# EAGLE board ADC_Breakout_broken (EAGLE 7.2.0)

Size 24.51 x 21.59 mm. Coordinates in mm from the lower left corner, seen from the top.
Outline: 0,0 24.51,0 24.51,21.59 0,21.59 0,0
Copper layers (1*16): Top 0.035mm / dielectric 1.5mm / Bottom 0.035mm
Design rules "default": minimum track width 10mil, minimum drill 24mil, track to track 8mil, track to pad 8mil, pad to pad 8mil, via to via 8mil, smd to smd 8mil, copper to edge 40mil, drill to drill 8mil, minimum pad ring 10mil, minimum via ring 8mil, stop-mask expansion 4mil, vias tented up to drill 0mil, thermal gap 10mil

## Footprints (pad centres in the part's own frame; a part is rotated, then mirrored left to right if it is on the bottom)
TSSOP-30 = smd 0.22 x 1: P$1 0,0; P$2 0.5,0; P$3 1,0; P$4 1.5,0; P$5 2,0; P$6 2.5,0; P$7 3,0; P$8 3.5,0; P$9 4,0; P$10 4.5,0; P$11 5,0; P$12 5.5,0; P$13 6,0; P$14 6.5,0; P$15 7,0; P$16 0,5.4; P$17 0.5,5.4; P$18 1,5.4; P$19 1.5,5.4; P$20 2,5.4; P$21 2.5,5.4; P$22 3,5.4; P$23 3.5,5.4; P$24 4,5.4; P$25 4.5,5.4; P$26 5,5.4; P$27 5.5,5.4; P$28 6,5.4; P$29 6.5,5.4; P$30 7,5.4
C0603 = smd 1.1 x 1: 1 -0.85,0; 2 0.85,0
C0805 = smd 1.3 x 1.5: 1 -0.95,0; 2 0.95,0
1X08 = drill 1.016 long: 1 -8.89,0; 2 -6.35,0; 3 -3.81,0; 4 -1.27,0; 5 1.27,0; 6 3.81,0; 7 6.35,0; 8 8.89,0
R1206 = smd 1.6 x 1.803: 1 -1.422,0; 2 1.422,0
SOIC-8 = smd 0.41 x 1.05: P$1 0,0; P$2 1.27,0; P$3 2.54,0; P$4 3.81,0; P$5 0,4.95; P$6 1.27,4.95; P$7 2.54,4.95; P$8 3.81,4.95

## Placement (x,y rotation side)
ADS7950  ADS7950  [TSSOP-30]  9.53,8.89 0 top
C1  1.0uF  [C0603]  11.56,16.38 180 bottom
C2  1.0uF  [C0603]  16.76,8.89 0 bottom
C3  10uF  [C0805]  12.57,6.99 180 bottom
C4  10uF  [C0805]  6.1,2.41 90 bottom
C5  10uF  [C0603]  11.68,6.6 180 top
C6  1.0uF  [C0603]  12.32,2.03 0 top
C7  0.1uF  [C0603]  5.97,19.68 270 bottom
C8  0.1uF  [C0603]  11.56,17.91 0 top
C9  270pF  [C0603]  14.99,15.88 0 top
C10  270pF  [C0603]  18.29,15.88 0 top
C11  270pF  [C0603]  18.29,7.11 180 top
C12  270pF  [C0603]  15.11,7.11 180 top
JP1  Left Header  [1X08]  1.91,10.79 270 top
JP2  Right Header  [1X08]  22.86,10.79 270 top
R0  33Ohm  [R1206]  11.18,1.4 0 bottom
R1  33Ohm  [R1206]  17.78,1.4 0 bottom
R2  33Ohm  [R1206]  10.79,20.19 180 bottom
R3  33Ohm  [R1206]  17.27,20.19 180 bottom
REF5025  REF5025  [SOIC-8]  10.79,13.97 180 bottom

## Library data of the parts
ADS7950 REF5025 = Ian
C1-C12 R0 R1-R3 = rcl
JP1 JP2 = Ian_Header

## Nets
+3V3: ADS7950.P$28 C7.1 JP2.8
+5V: ADS7950.P$5 C1.1 C6.1 JP2.1 REF5025.P$2
N$1: C2.1 REF5025.P$5
N$2: ADS7950.P$21 C8.1
N$3: ADS7950.P$29 JP1.1
N$4: ADS7950.P$7
N$5: ADS7950.P$30 JP1.2
N$6: ADS7950.P$1 JP1.3
N$7: ADS7950.P$2 JP1.4
N$8: ADS7950.P$8
N$9: JP1.7 R1.2
N$10: JP1.6 R2.2
N$11: JP1.5 R3.2
N$13: ADS7950.P$18 C10.1 R1.1
N$14: ADS7950.P$14 C11.1 R2.1
N$15: JP1.8 R0.2
N$16: ADS7950.P$23 JP2.6
N$17: ADS7950.P$12 C12.1 R3.1
N$18: ADS7950.P$26 JP2.3
N$19: ADS7950.P$25 JP2.4
N$20: ADS7950.P$24 JP2.5
N$21: ADS7950.P$20 C9.1 R0.1
REFM: ADS7950.P$3 ADS7950.P$6 ADS7950.P$9 ADS7950.P$10 ADS7950.P$22 ADS7950.P$27 C1.2 C2.2 C3.2 C4.2 C5.2 C6.2 C7.2 C8.2 C9.2 C10.2 C11.2 C12.2 JP2.7 REF5025.P$4
REFP: ADS7950.P$4 C3.1 C4.1 C5.1 REF5025.P$6

## Tracks (layer width: path | path; a pad name or v marks a point on that pad's centre or on a via)
+3V3  (2 unrouted)
+5V  (4 unrouted)
N$1  (1 unrouted)
N$2  (1 unrouted)
N$3  (1 unrouted)
N$5  (1 unrouted)
N$6  (1 unrouted)
N$7  (1 unrouted)
N$9  (1 unrouted)
N$10  (1 unrouted)
N$11  (1 unrouted)
N$13  (2 unrouted)
N$14  (2 unrouted)
N$15  (1 unrouted)
N$16  (1 unrouted)
N$17  (2 unrouted)
N$18  (1 unrouted)
N$19  (1 unrouted)
N$20  (1 unrouted)
N$21  (2 unrouted)
REFM  (19 unrouted)
REFP  (4 unrouted)

## Text on the board
tPlace: ADC Module | +5V | GPIO0 | GPIO1 | GPIO2 | SDO | GPIO3 | SDI | CH3 | SCLK | CH2 | !CS! | CH1 | GND | CH0 | FYP2015 / Designed by: / Ian Hua | +3.3V